# Altium PCB BOARD.PcbDoc
Units mm, origin at the board's own origin, x right, y up, seen from the top; angles counter-clockwise.
Board outline 35 x 24 mm, 2 copper layers (Top Layer, Bottom Layer), stack 1.18 mm thick; 51 components, 35 nets, 177 pads, 108 vias.
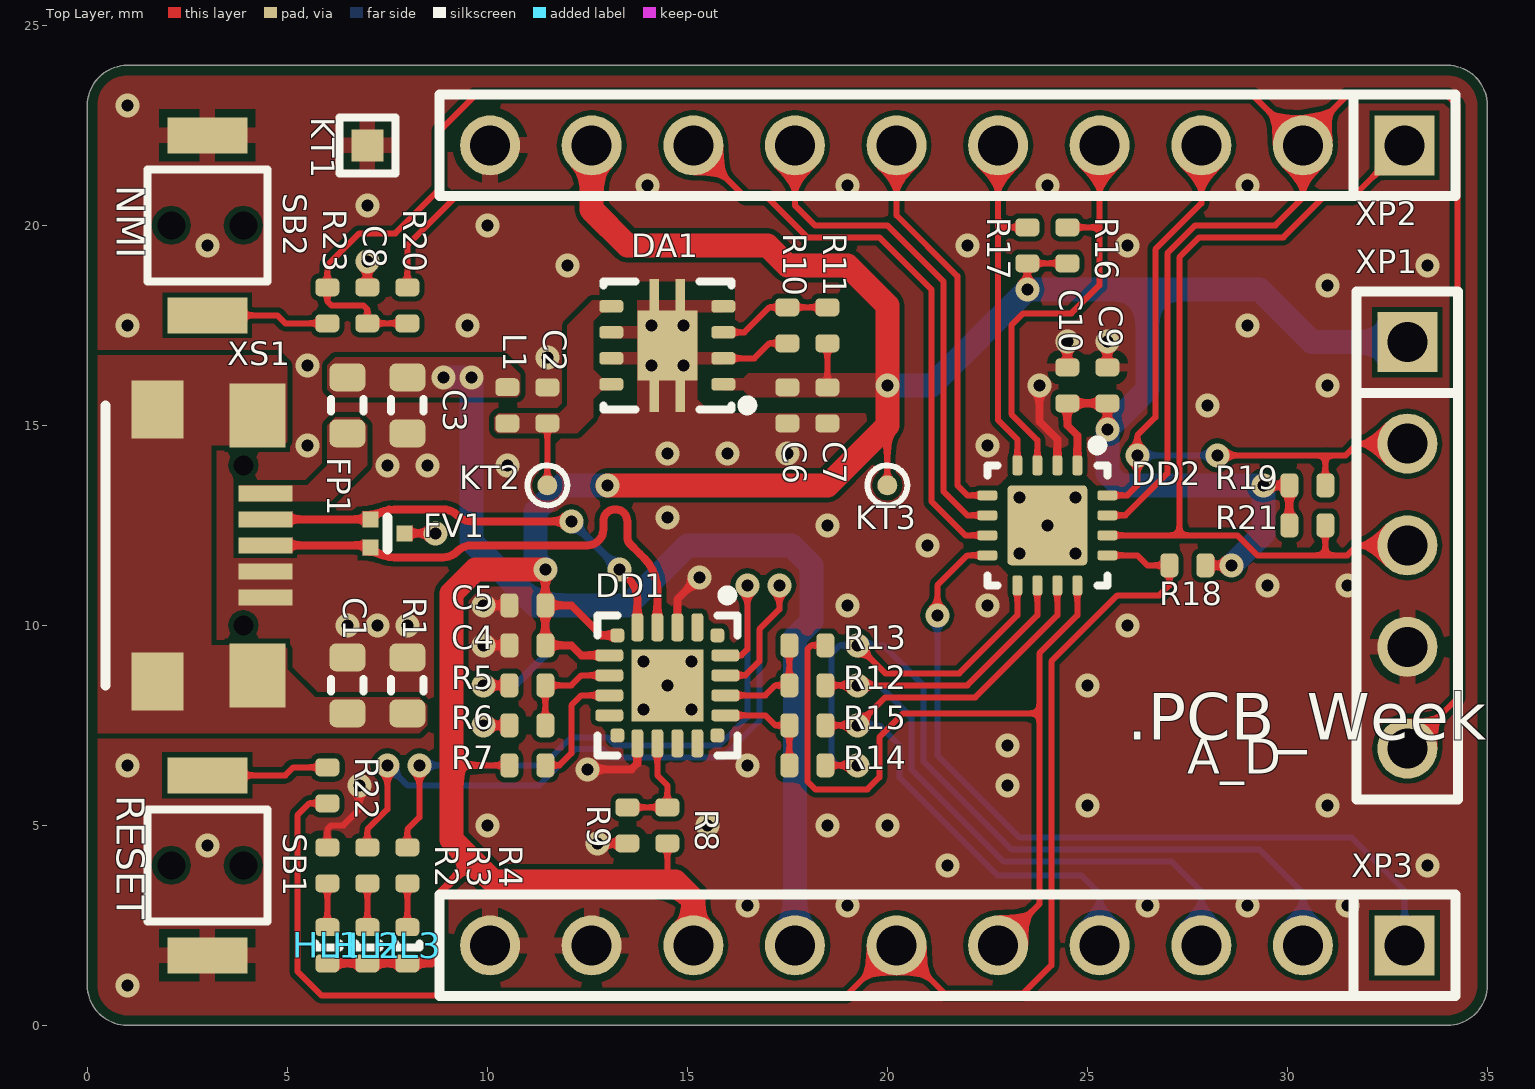
[diagram p0: Top Layer view]
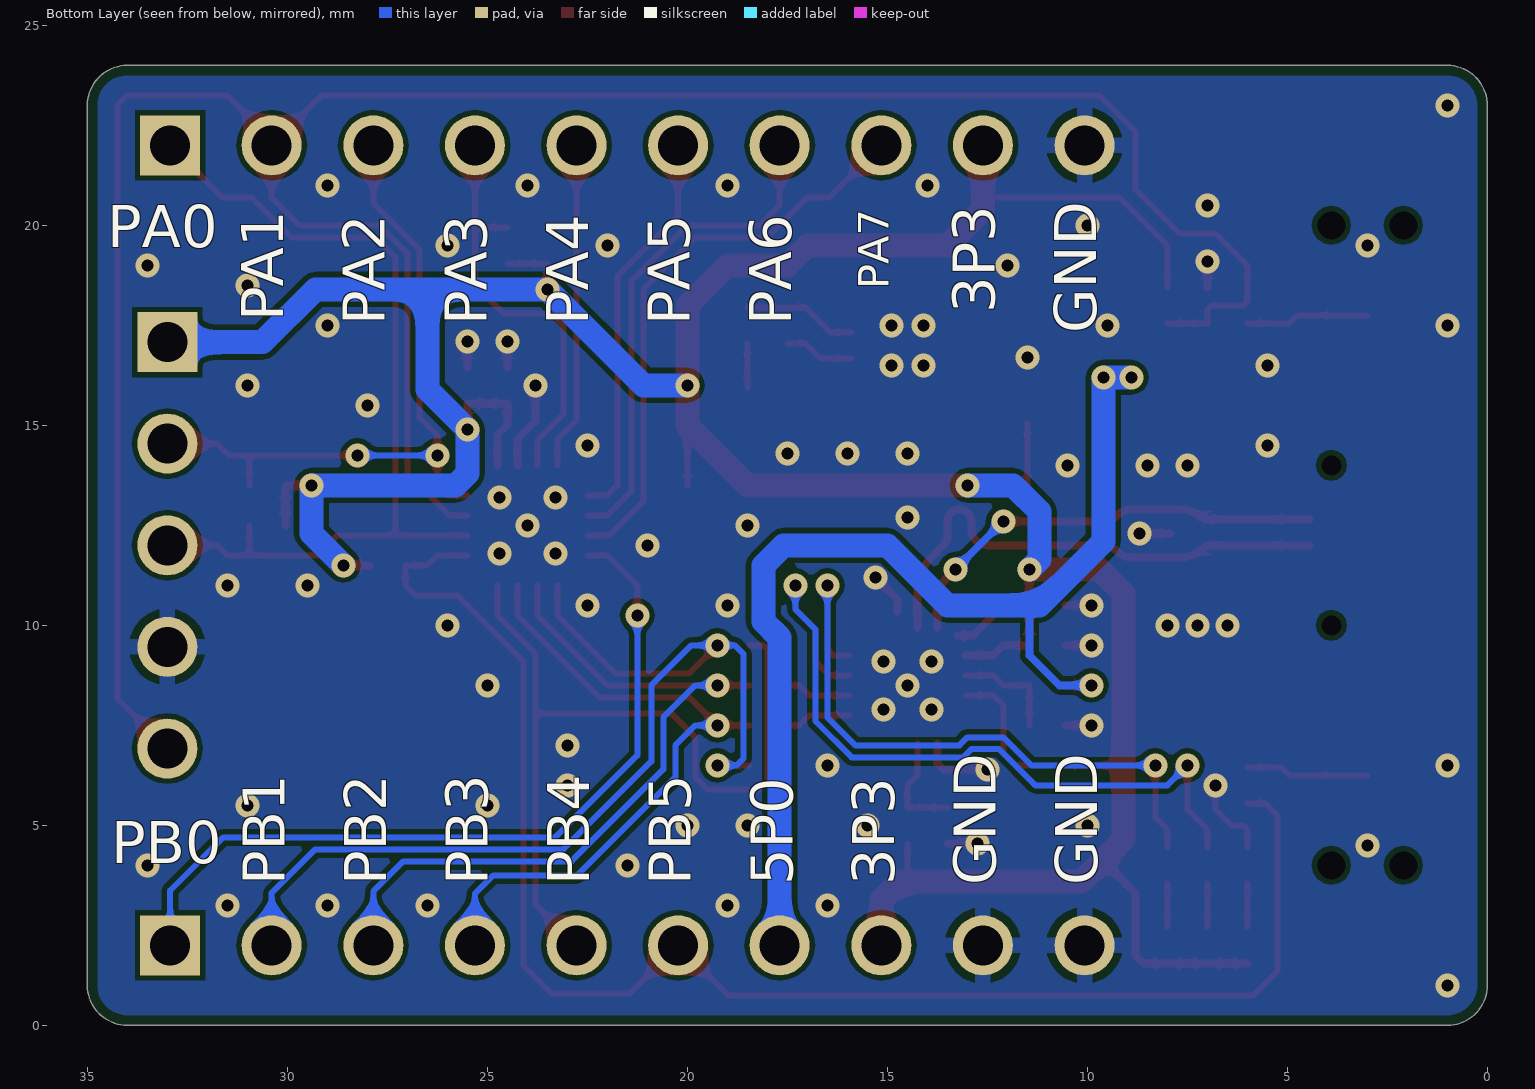
[diagram p1: Bottom Layer view, seen from below]
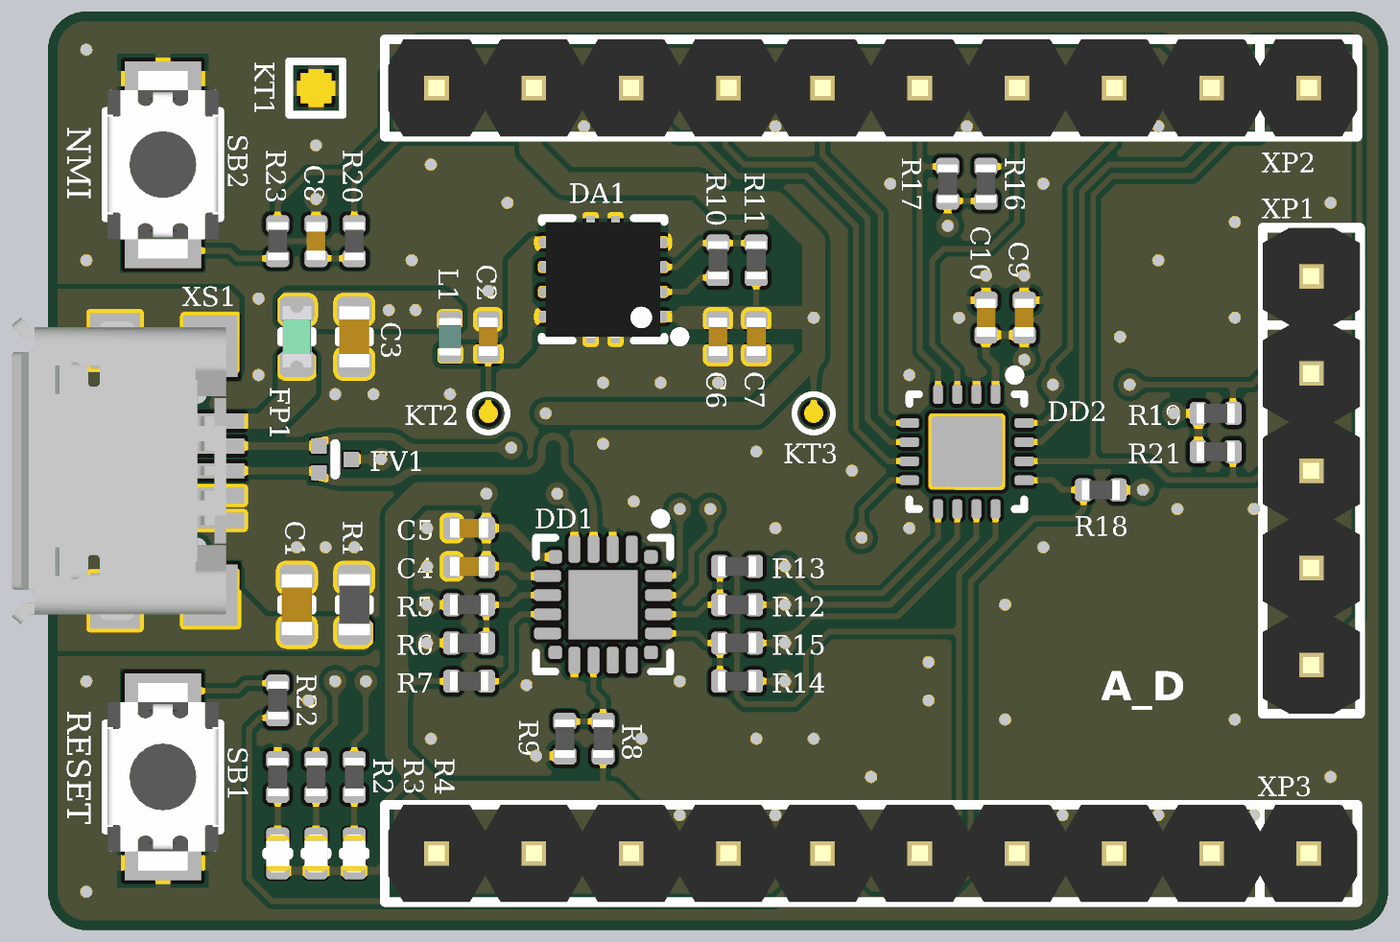
[diagram p2: 3D render of the assembled board from above, using the file's embedded part models]

## Layer stack, top to bottom
Top Solder: solder mask 0.01, Solder Resist, Dk 3.5
Top Layer: signal copper 0.03
Dielectric1: core 1.12, FR-4, Dk 4.2
Bottom Layer: signal copper 0.03
Bottom Solder: solder mask 0.01, Solder Resist, Dk 3.5

## Board outline
0,1 ccw(c1,1) 1,0 34,0 ccw(c34,1) 35,1 35,23 ccw(c34,23) 34,24 1,24 ccw(c1,23) 0,23

## Design rules (kind name [scope] priority, off if disabled: settings)
BoardOutlineClearance [All] p1: gap=0.25 ignorepadtopadclearanceinfootprint=FALSE
Clearance [All] p1: gap=0.127 ignorepadtopadclearanceinfootprint=FALSE
ComponentClearance [All] p1 off: gap=0.25 collisioncheckmode=3 verticalgap=0.25 showdistances=FALSE
DiffPairsRouting [All] p1: maxlimit=0.4 minlimit=0.15 mostfreqgap=0.25 toplayer_minwidth=0.2 toplayer_maxwidth=0.4 toplayer_prefwidth=0.25 bottomlayer_minwidth=0.2 bottomlayer_maxwidth=0.4 bottomlayer_prefwidth=0.25 maxuncoupledlength=12
Height [All] p1: minheight=0 maxheight=25 prefheight=25
HoleSize [All] p1: absolutevalues=TRUE maxlimit=6 minlimit=0.3 maxpercent=80.000 minpercent=20.000
HoleToHoleClearance [All] p1: gap=0.25 allowstackedmicrovias=TRUE
MatchedLengths "Schematic Matched Net Lengths" [InNet('USBD_P')] p1: tolerance=1 checknetsindiffpair=TRUE checkdiffpairvsdiffpair=FALSE checkxsignals=FALSE checkothers=FALSE
MatchedLengths "Schematic Matched Net Lengths_7" [InNetClass('USBD')] p2: tolerance=1 checknetsindiffpair=TRUE checkdiffpairvsdiffpair=FALSE checkxsignals=FALSE checkothers=FALSE
MinimumSolderMaskSliver [All] p1 off: minsoldermaskwidth=0.254
PlaneClearance [All] p1: clearance=0.5
PlaneConnect [All] p1: planeconnectstyle=Relief reliefexpansion=0.5 reliefentries=4 reliefconductorwidth=0.25 reliefairgap=0.25
PolygonConnect PolygonConnect_DirectConnect [InComponentClass('DirectConnect')] p1: connectstyle=Direct reliefconductorwidth=0.254 reliefentries=4 polygonreliefangle="90 Angle" airgapwidth=0.254
PolygonConnect PolygonConnect_Components [InComponent('C*') OR InComponent('R*') OR InComponent('NR*') OR InComponent('DA*') OR InComponent('DD*') OR InComponent('HL*')] p2: connectstyle=Relief reliefconductorwidth=0.2 reliefentries=4 polygonreliefangle="90 Angle" airgapwidth=0.2
PolygonConnect PolygonConnect_Connectors [All vs (InPadClass('All Pads'))] p3: connectstyle=Relief reliefconductorwidth=0.4 reliefentries=4 polygonreliefangle="90 Angle" airgapwidth=0.2
PolygonConnect PolygonConnect_Via [All] p4: connectstyle=Direct reliefconductorwidth=0.254 reliefentries=4 polygonreliefangle="90 Angle" airgapwidth=0.254
RoutingCorners [All] p1: cornerstyle=45-Degree minsetback=1.5 maxsetback=3.5
RoutingVias [All] p1: holewidth=0.6 width=1.2 viastyle="Through Hole" minholewidth=0.3 minwidth=0.6 maxholewidth=1 maxwidth=2
SMDEntry [All] p1: side=TRUE corner=TRUE anyangle=TRUE
SilkToSilkClearance [All] p1 off: silktosilkclearance=0.254
SilkToSolderMaskClearance [IsPad] p1 off: minsilkscreentomaskgap=0.254 clearancetoexposedcopper=TRUE
SolderMaskExpansion [All] p1: expansion=0.1
Width [All] p1: maxlimit=8 minlimit=0.15 preferedwidth=0.6
Width Width_TrackEnds [All] p2 off: maxlimit=0.25 minlimit=0.25 preferedwidth=0.25 checkconnectedcopper=TRUE
19 further rules are at their usual default settings.

## Classes and differential pairs
differential pair class USB: USBD
component class DirectConnect: C1 C2 C3 C4 C5 C6 C7 DA1 FP1 L1 R1 XS1
differential pair USBD: +USBD_P -USBD_N

## Components (designator, comment, footprint, x,y, rotation, side; value= is the part's Value field where it differs from the comment)
C1 "Capacitor" C0603_L 6.5,8.5 r270 top value=0.1uF
C2 "Capacitor" C0402_L 11.5,15.5 r270 top value=4.7uF
C3 "Capacitor" C0603_L 8,15.5 r90 top value=10uF
C4 "Capacitor" C0402_L 11,9.5 r0 top value=4.7uF
C5 "Capacitor" C0402_L 11,10.5 r0 top value=4.7uF
C6 "Capacitor" C0402_L 17.5,15.5 r90 top value=4.7uF
C7 "Capacitor" C0402_L 18.5,15.5 r90 top value=4.7uF
C8 "Capacitor" C0402_L 7,18 r90 top value=0.1uF
C9 "Capacitor" C0402_L 25.5,16 r90 top value=1uF
C10 "Capacitor" C0402_L 24.5,16 r270 top value=0.1uF
DA1 "TPS73701DRB" VSON-8_065P300X300X100_N 14.5,17 r90 top locked value=TPS73701DRBR
DD1 "CP2102N-xxx-GQFN20" QFN-20_050P300X300X080_N 14.5,8.5 r270 top locked value=CP2102N-A01-GQFN20
DD2 "MKL03ZxxVFG4-Series" HUQFN-16_050P300X300X065_N 24,12.5 r270 top locked value=MKL03Z8VFG4
FP1 "Fuse_PTC" F0603_L 6.5,15.5 r90 top value=0603L100SLYR
FV1 "TPD2EUSB30DRT" SOT-3_070P100X080X050_N 7.5,12.3 r270 top
HL1 "" LD0402_L 6,2 r90 top value=KPHHS-1005QBC-D-V
HL2 "" LD0402_L 7,2 r90 top value=KPHHS-1005CGCK
HL3 "" LD0402_L 8,2 r90 top value=KPHHS-1005SURCK
KT1 "Text" TP-SMT-R-0.8mm 7,22 r0 top value=TestPoint-SMT
KT2 "Text" TP-SMT-C-0.5mm 11.5,13.5 r0 top value=TestPoint-SMT
KT3 "Text" TP-SMT-C-0.5mm 20,13.5 r0 top value=TestPoint-SMT
L1 "FerriteBead" L0402_L 10.5,15.5 r270 top value=BLM15PD121SN1D
R1 "Resistor" R0603_L 8,8.5 r270 top value=0
R2 "Resistor" R0402_L 6,4 r270 top value=1k
R3 "Resistor" R0402_L 7,4 r270 top value=1k
R4 "Resistor" R0402_L 8,4 r270 top value=1k
R5 "Resistor" R0402_L 11,8.5 r0 top value=22.1k
R6 "Resistor" R0402_L 11,7.5 r0 top value=47k
R7 "Resistor" R0402_L 11,6.5 r180 top value=10k
R8 "Resistor" R0402_L 14.5,5 r270 top value=10k
R9 "Resistor" R0402_L 13.5,5 r90 top value=0
R10 "Resistor" R0402_L 17.5,17.5 r90 top value=12k
R11 "Resistor" R0402_L 18.5,17.5 r270 top value=22.1k
R12 "Resistor" R0402_L 18,8.5 r0 top value=0
R13 "Resistor" R0402_L 18,9.5 r0 top value=0
R14 "Resistor" R0402_L 18,6.5 r0 top value=0
R15 "Resistor" R0402_L 18,7.5 r0 top value=0
R16 "Resistor" R0402_L 24.5,19.5 r270 top value=4.7k
R17 "Resistor" R0402_L 23.5,19.5 r270 top value=4.7k
R18 "Resistor" R0402_L 27.5,11.5 r180 top value=10k
R19 "Resistor" R0402_L 30.5,13.5 r0 top value=10k
R20 "Resistor" R0402_L 8,18 r270 top value=10k
R21 "Resistor" R0402_L 30.5,12.5 r0 top value=10k
R22 "Resistor" R0402_L 6,6 r90 top value=100
R23 "Resistor" R0402_L 6,18 r270 top value=100
SB1 "RESET" IT-1185AP 3,4 r0 top locked value=IT-1185AP
SB2 "NMI" IT-1185AP 3,20 r180 top locked value=IT-1185AP
XP1 "Text" PLS-5 33,12 r270 top locked value=PLS-5
XP2 "PA" PLS-10 21.5,22 r180 top locked value=PLS-10
XP3 "PB" PLS-10 21.5,2 r180 top locked value=PLS-10
XS1 "USB" 1981568-1 2,12 r270 top locked value=1981568-1

## Footprints (in the part's own frame and the unit in brackets; to place one, negate y for a bottom-side part, rotate by r counter-clockwise, add the part's x,y. Pads: shape width x height; smd on the part's side, far side on the other; paste and mask are expansions set on the pad)
1981568-1 [mm]
  round 0 hole 0.5 unplated: 0(-2,1.9) 0(2,1.9)
  rect 0.4x1.35 smd: 1(-1.3,2.45) 2(-0.65,2.45) 3(0,2.45) 4(0.65,2.45) 5(1.3,2.45)
  rect 1.45x1.3 smd: 6(-3.4,-0.25) 6(3.4,-0.25)
  rect 1.6x1.4 smd: 6(-3.25,2.25) 6(3.25,2.25)
  silkscreen extent -3.5,-1.55 3.5,-1.55, body extent -4,-2.95 4,2.65, height 2.79
C0402_L [mm] "Chip Capacitor; Body 1.0 x 0.5 mm (LxW typ)"
  rrect50% 0.45x0.6 smd: 1(-0.45,0) 2(0.45,0)
  body extent -0.5,-0.25 0.5,0.25, height 0.61
C0603_L [mm] "Chip Capacitor; Body 1.6 x 0.8 mm (LxW typ)"
  rrect50% 0.7x0.9 smd: 1(-0.7,0) 2(0.7,0)
  silkscreen extent -0.15,-0.41 0.15,0.41, body extent -0.8,-0.4 0.8,0.4, height 0.91
F0603_L [mm] "1608M"
  rrect50% 0.7x0.9 smd: 1(-0.7,0) 2(0.7,0)
  silkscreen extent -0.15,-0.41 0.15,0.41, body extent -0.8,-0.37 0.8,0.38, height 0.75
HUQFN-16_050P300X300X065_N [mm]
  rrect50% 0.5x0.25 smd: 1(-1.5,0.75) 2(-1.5,0.25) 3(-1.5,-0.25) 4(-1.5,-0.75) 9(1.5,-0.75) 10(1.5,-0.25) 11(1.5,0.25) 12(1.5,0.75)
  rrect50% 0.25x0.5 smd: 5(-0.75,-1.5) 6(-0.25,-1.5) 7(0.25,-1.5) 8(0.75,-1.5) 13(0.75,1.5) 14(0.25,1.5) 15(-0.25,1.5) 16(-0.75,1.5)
  rrect10% 2x2 smd paste-0.075: TP(0,0)
  silkscreen extent -2.12,-1.5 1.5,1.5, body extent -1.5,-1.5 1.5,1.5, height 0.65
IT-1185AP [mm]
  rect 2x0.9 smd: 1(0,2.25) 2(0,-2.25)
  round 0.1 hole 0.7 unplated: 4(-0.9,0) 4(0.9,0)
  silkscreen extent -1.5,-1.4 1.5,1.4, body extent -1.45,-2.45 1.45,2.45, height 2.04
L0402_L [mm] "Chip Coil; Body 1.0 x 0.5 mm (LxW typ)"
  rrect50% 0.45x0.6 smd mask+0.05: 1(-0.452,0) 2(0.452,0)
  body extent -0.5,-0.3 0.5,0.3, height 0.5
LD0402_L [mm] "Chip Led; Body 1.0 x 0.5 mm (LxW typ)"
  rrect50% 0.45x0.6 smd mask+0.05: 1(-0.452,0) 2(0.452,0)
  silkscreen extent -0.05,-0.3 0.05,0.3, body extent -0.5,-0.3 0.5,0.3, height 0.2
PLS-5 [mm]
  rect 1.5x1.5 hole 1: 1(-5.08,0)
  round 1.5 hole 1: 2(-2.54,0) 3(0,0) 4(2.54,0) 5(5.08,0)
  silkscreen extent -6.35,-1.27 6.35,1.27, body extent -6.35,-1.27 6.35,1.27, height 8.9
PLS-10 [mm]
  rect 1.5x1.5 hole 1: 1(-11.43,0)
  round 1.5 hole 1: 2(-8.89,0) 3(-6.35,0) 4(-3.81,0) 5(-1.27,0) 6(1.27,0) 7(3.81,0) 8(6.35,0) 9(8.89,0) 10(11.43,0)
  silkscreen extent -12.7,-1.27 12.7,1.27, body extent -12.7,-1.27 12.62,1.27, height 8.9
QFN-20_050P300X300X080_N [mm]
  rrect50% 0.35x0.35 smd: 1(-1.25,1.25) 6(-1.25,-1.25) 11(1.25,-1.25) 16(1.25,1.25)
  rrect50% 0.7x0.3 smd: 2(-1.45,0.75) 3(-1.45,0.25) 4(-1.45,-0.25) 5(-1.45,-0.75) 12(1.45,-0.75) 13(1.45,-0.25) 14(1.45,0.25) 15(1.45,0.75)
  rrect50% 0.3x0.7 smd: 7(-0.75,-1.45) 8(-0.25,-1.45) 9(0.25,-1.45) 10(0.75,-1.45) 17(0.75,1.45) 18(0.25,1.45) 19(-0.25,1.45) 20(-0.75,1.45)
  rect 1.8x1.8 smd: TP(0,0)
  silkscreen extent -2.37,-1.75 1.75,1.75, body extent -1.5,-1.5 1.5,1.5, height 0.8
R0402_L [mm] "Chip Resistor; Body 1.0 x 0.5 mm (LxW typ)"
  rrect50% 0.45x0.6 smd: 1(-0.45,0) 2(0.45,0)
  body extent -0.5,-0.26 0.5,0.26, height 0.36
R0603_L [mm] "Chip Resistor; Body 1.6 x 0.8 mm (LxW typ)"
  rrect50% 0.7x0.9 smd: 1(-0.7,0) 2(0.7,0)
  silkscreen extent -0.15,-0.41 0.15,0.41, body extent -0.8,-0.41 0.8,0.41, height 0.46
SOT-3_070P100X080X050_N [mm]
  rect 0.4x0.4 smd mask+0.05: 1(-0.35,-0.425) 2(0,0.425) 3(0.35,-0.425)
  silkscreen extent -0.4,0 0.4,0, body extent -0.5,-0.4 0.5,0.4, height 0.5
TP-SMT-C-0.5mm [mm]
  round 0.5 smd paste-1: 1(0,0)
  silkscreen extent -0.5,-0.5 0.5,0.5
TP-SMT-R-0.8mm [mm]
  rect 0.8x0.8 smd paste-1: 1(0,0)
  silkscreen extent -0.7,-0.7 0.7,0.7
VSON-8_065P300X300X100_N [mm]
  rrect50% 0.31x0.6 smd paste-0.025: 1(-0.975,-1.4) 2(-0.325,-1.4) 3(0.325,-1.4) 4(0.975,-1.4) 5(0.975,1.4) 6(0.325,1.4) 7(-0.325,1.4) 8(-0.975,1.4)
  rect 0.825x0.23 smd: TP(-1.25,-0.325) TP(-1.25,0.325) TP(1.25,-0.325) TP(1.25,0.325)
  rect 1.75x1.5 smd: TP(0,0)
  silkscreen extent -1.62,-2.13 1.6,1.6, body extent -1.52,-1.52 1.52,1.52, height 1.04

## Part data
C1: library part GRM188R72A104KA35D, Dielectric Type=X7R, Manufacturer=Murata, Tolerance=±10%, Voltage=100V, Working Temperature Max=+125°С, Working Temperature Min=-55°С, Application Category=1, ClassName=DirectConnect, ID=232, Part Number=GRM188R72A104KA35D, Published=18.05.2010, Publisher="Andrew Danich", Type=Конденсатор
C2 C4 C5 C6 C7: library part GRM155R60J475ME87D, Dielectric Type=X5R, Manufacturer=Murata, Tolerance=±20%, Voltage=6.3V, Working Temperature Max=+85°С, Working Temperature Min=-55°С, Application Category=1, ClassName=DirectConnect, ID=223, Part Number=GRM155R60J475ME87D, Published=18.05.2010, Publisher="Andrew Danich", Type=Конденсатор
C3: library part GRM188R60J106ME47D, Dielectric Type=X5R, Manufacturer=Murata, Tolerance=±20%, Voltage=6.3V, Working Temperature Max=+85°С, Working Temperature Min=-55°С, Application Category=1, ClassName=DirectConnect, ID=136, Part Number=GRM188R60J106ME47D, Published=18.05.2010, Publisher="Andrew Danich", Type=Конденсатор
C8 C10: library part GCM155R71C104KA55D, Dielectric Type=X7R, Manufacturer=Murata, Tolerance=±10%, Voltage=16V, Working Temperature Max=+125°С, Working Temperature Min=-55°С, Application Category=1, Functional Analog=GRM155R71C104KA88D, ID=163, Part Number=GCM155R71C104KA55D, Published=18.05.2010, Publisher="Andrew Danich", Type=Конденсатор
C9: library part GRM155C71A105KE11D, Dielectric Type=X7S, Manufacturer=Murata, Tolerance=±10%, Voltage=10V, Working Temperature Max=+125°С, Working Temperature Min=-55°С, Application Category=1, ID=179, Part Number=GRM155C71A105KE11D, Published=18.05.2010, Publisher="Andrew Danich", Type=Конденсатор
DA1: library part TPS73701DRBR, Input Voltage=+2.2…5.5V, Manufacturer="Texas Instruments", Output Current=1A, Output Voltage=+1.2…5.5V, Working Temperature Max=+125°С, Working Temperature Min=-40°С, Application Category=1, ClassName=DirectConnect, Functional Analog=TPS73701DRBT, ID=26, Part Number=TPS73701DRBR, Published=25.03.2019, Publisher="Andrew Danich", Type=Микросхема
DD1: library part CP2102N-A01-GQFN20, Manufacturer="Silicon Labs", Supply Current=13.7mA, Working Temperature Max=+85°C, Working Temperature Min=-40°C, Application Category=1, Channels=1, Functional Analog=CP2102N-A02-GQFN20, ID=14, Input Interface=UART, OTG Support=No, Part Number=CP2102N-A01-GQFN20, Published=16.07.2019, Publisher="Andrew Danich", Supply Operation=+3.0…3.6V, Type=Микросхема, USB Speed Support="12 Mb/s", USB Type Support="USB 2.0"
DD2: library part MKL03Z8VFG4, Manufacturer="NXP Semiconductors", Operation Frequency=48MHz, Working Temperature Max=+105°С, Working Temperature Min=-40°С, Application Category=1, EEPROM=-, Flash=8K, I/O Lines=14, ID=29, Part Number=MKL03Z8VFG4, Prog Interface=SWD, Published=16.07.2019, Publisher="Andrew Danich", SRAM=2K, Supply Operation=+1.71…3.6V, Type=Микросхема
FP1: library part 0603L100SLYR, Limit Voltage=6V, Manufacturer=Littelfuse, Rated Current=1A, Resistance=0.12ohm, Working Temperature Max=+85°С, Working Temperature Min=-40°С, Application Category=1, ClassName=DirectConnect, Functional Analog=-, ID=13, Part Number=0603L100SLYR, Published=25.0.2017, Type="Предохранитель самовосстанавливающийся"
FV1: Breakdown Voltage=7V, Forward Voltage=0.95V, Junction Capacitance=0.8pF, Manufacturer="Texas Instruments", Peak Forward Current=5A, Pulse Power Dissipation=45W, Reverse Stand Off Voltage=5.5V, Working Temperature Max=+85°С, Working Temperature Min=-40°С, Application Category=1, Directional=Bidirectional, Functional Analog=-, ID=5, Part Number=TPD2EUSB30DRT, Published=27.12.2015, Publisher="Andrew Danich", Type=Супрессор
HL1: library part KPHHS-1005QBC-D-V, Color=Blue, Forward Current=20mA, Forward Voltage=3.3V, Manufacturer=Kingbright, Power Dissipation=120mW, Working Temperature Max=+85°С, Working Temperature Min=-40°С, Application Category=1, ID=24, Leds=1, Luminous Flux=60, Part Number=KPHHS-1005QBC-D-V, Published=03.12.2013, Publisher="Andrew Danich", Type="Индикатор единичный"
HL2: library part KPHHS-1005CGCK, Color=Green, Forward Current=20mA, Forward Voltage=2.1V, Manufacturer=Kingbright, Power Dissipation=75mW, Working Temperature Max=+85°С, Working Temperature Min=-40°С, Application Category=1, ID=25, Leds=1, Luminous Flux=60, Part Number=KPHHS-1005CGCK, Published=03.12.2013, Publisher="Andrew Danich", Type="Индикатор единичный"
HL3: library part KPHHS-1005SURCK, Color=Red, Forward Current=20mA, Forward Voltage=2.5V, Manufacturer=Kingbright, Power Dissipation=75mW, Working Temperature Max=+85°С, Working Temperature Min=-40°С, Application Category=1, ID=35, Leds=1, Luminous Flux=140, Part Number=KPHHS-1005SURCK, Published=03.12.2013, Publisher="Andrew Danich", Type="Индикатор единичный"
KT1: library part TestPoint-SMT-GND, Manufacturer=-, Application Category=1, Application Type="On PCB Test Point", Functional Analog=-, ID=7, Part Number=TestPoint-SMT-GND, Published=03.03.2015, Publisher="Andrew Danich"
KT2 KT3: library part TestPoint-SMT, Manufacturer=-, Application Category=1, Application Type="On PCB Test Point", Functional Analog=-, ID=6, Part Number=TestPoint-SMT, Published=03.03.2015, Publisher="Andrew Danich"
L1: library part BLM15PD121SN1D, DC Resistance=0.09ohm, Inductor Type=EMIFIL, Manufacturer=Murata, Rated Current=1.3A, Tolerance=±25%, Working Temperature Max=+125°С, Working Temperature Min=-55°С, Application Category=1, ClassName=DirectConnect, ID=11, Impedance at 100Mhz=120ohm, Part Number=BLM15PD121SN1D, Published=14.11.2014, Publisher="Andrew Danich", Type=Дроссель
R1: library part RC0603JR-070R, Limit Voltage=50V, Manufacturer=Yageo, Temperature Coefficient=100ppm, Tolerance=±5%, Total Power Dissipation=0.1W, Working Temperature Max=+155°С, Working Temperature Min=-55°С, Application Category=1, ClassName=DirectConnect, Functional Analog="RC0603FR-070RL, CR0603-J/-000E", ID=5, Part Number=RC0603JR-070R, Published=24.03.2010, Publisher="Andrew Danich", Series Type=Thick-Film, Type=Резистор
R2 R3 R4: library part RC0402JR-071KL, Limit Voltage=50V, Manufacturer=Yageo, Temperature Coefficient=100ppm, Tolerance=±5%, Total Power Dissipation=0.1W, Working Temperature Max=+155°С, Working Temperature Min=-55°С, Application Category=1, ID=3, Part Number=RC0402JR-071KL, Published=24.03.2010, Publisher="Andrew Danich", Series Type=Thick-Film, Type=Резистор
R5 R11: library part RC0402FR-0722K1L, Limit Voltage=50V, Manufacturer=Yageo, Temperature Coefficient=100ppm, Tolerance=±1%, Total Power Dissipation=0.1W, Working Temperature Max=+155°С, Working Temperature Min=-55°С, Application Category=1, ID=447, Part Number=RC0402FR-0722K1L, Published=24.03.2010, Publisher="Andrew Danich", Series Type=Thick-Film, Type=Резистор
R6: library part RC0402FR-0747KL, Limit Voltage=50V, Manufacturer=Yageo, Temperature Coefficient=100ppm, Tolerance=±1%, Total Power Dissipation=0.1W, Working Temperature Max=+155°С, Working Temperature Min=-55°С, Application Category=1, ID=528, Part Number=RC0402FR-0747KL, Published=24.03.2010, Publisher="Andrew Danich", Series Type=Thick-Film, Type=Резистор
R7 R8 R18 R19 R20 R21: library part RC0402JR-0710KL, Limit Voltage=50V, Manufacturer=Yageo, Temperature Coefficient=100ppm, Tolerance=±5%, Total Power Dissipation=0.1W, Working Temperature Max=+155°С, Working Temperature Min=-55°С, Application Category=1, ID=476, Part Number=RC0402JR-0710KL, Published=24.03.2010, Publisher="Andrew Danich", Series Type=Thick-Film, Type=Резистор
R9 R12 R13 R14 R15: library part RC0402JR-070RL, Limit Voltage=50V, Manufacturer=Yageo, Temperature Coefficient=100ppm, Tolerance=±5%, Total Power Dissipation=0.1W, Working Temperature Max=+155°С, Working Temperature Min=-55°С, Application Category=1, ID=362, Part Number=RC0402JR-070RL, Published=24.03.2010, Publisher="Andrew Danich", Series Type=Thick-Film, Type=Резистор
R10: library part RC0402FR-0712KL, Limit Voltage=50V, Manufacturer=Yageo, Temperature Coefficient=100ppm, Tolerance=±1%, Total Power Dissipation=0.1W, Working Temperature Max=+155°С, Working Temperature Min=-55°С, Application Category=1, ID=318, Part Number=RC0402FR-0712KL, Published=24.03.2010, Publisher="Andrew Danich", Series Type=Thick-Film, Type=Резистор
R16 R17: library part RC0402JR-074K7L, Limit Voltage=50V, Manufacturer=Yageo, Temperature Coefficient=100ppm, Tolerance=±5%, Total Power Dissipation=0.1W, Working Temperature Max=+155°С, Working Temperature Min=-55°С, Application Category=1, ID=4, Part Number=RC0402JR-074K7L, Published=24.03.2010, Publisher="Andrew Danich", Series Type=Thick-Film, Type=Резистор
R22 R23: library part RC0402JR-07100RL, Limit Voltage=50V, Manufacturer=Yageo, Temperature Coefficient=100ppm, Tolerance=±5%, Total Power Dissipation=0.1W, Working Temperature Max=+155°С, Working Temperature Min=-55°С, Application Category=1, ID=479, Part Number=RC0402JR-07100RL, Published=24.03.2010, Publisher="Andrew Danich", Series Type=Thick-Film, Type=Резистор
SB1 SB2: library part IT-1185AP, Isolator Resistance=100meg, Limit Current=50mA, Resistance=0.1ohm, Application Category=1, Backlight=NO, Height=5mm, ID=36, Number of Contacts=2, Part Number=IT-1185AP, Published=17.04.2014, Publisher="Andrew Danich", Type=Переключатель
XP1: library part PLS-5, Limit Current=3A, Limit Voltage=250V, Resistance=15momh, Application Category=1, Connector Type=Male, ID=4, Part Number=PLS-5, Pins=5, Pitch=2.54mm, Published=07.03.2013, Publisher="Andrew Danich", Surface Finish=Gold, Type=Вилка
XP2 XP3: library part PLS-10, Limit Current=3A, Limit Voltage=250V, Resistance=15momh, Application Category=1, Connector Type=Male, ID=9, Part Number=PLS-10, Pins=10, Pitch=2.54mm, Published=07.03.2013, Publisher="Andrew Danich", Surface Finish=Gold, Type=Вилка
XS1: library part 1981568-1, Limit Current=1A, Limit Voltage=24V, Manufacturer="TE Connectivity", Application Category=1, ClassName=DirectConnect, Connector Type=Female, ID=30, Interface="USB 2.0", Max Data Rate="480 mbps", Mount Type=Surface, Part Number=1981568-1, Pins=9, Published=11.04.2016, Publisher="Andrew Danich", Type=Розетка

## Via types
v1: diameter 0.6, hole 0.3, Top Layer to Bottom Layer, tented both sides, 94 vias
v2: diameter 0.6, hole 0.3, Top Layer to Bottom Layer, 14 vias

## Nets (pads, with @x,y where several pads share a name; then routed paths per layer and width w, separated by ;. In a path a pad name is that pad's centre, name@x,y a point inside that pad or via, vN(x,y) a via of type N, cw(c..) or ccw(c..) an arc to the next point about the centre after c; other vN are vias at no path point)
DEBUG_RX: DD1.17 R14.1 R15.1 | length 2.7
  Top Layer w0.15: DD1.17 16.95,7.75 17.2,7.5 R15.1 R14.1
DEBUG_TX: DD1.18 R12.1 R13.1 | length 2.7
  Top Layer w0.15: DD1.18 16.95,8.25 17.2,8.5 R12.1 R13.1
GND: C1.1 C2.1 C3.1 C4.1 C5.1 C6.1 C7.1 C8.2 C9.2 C10.1 DA1.2 DA1.4 DA1.6 DA1.7 DA1.TP DD1.3 DD1.12 DD1.TP DD2.2 DD2.TP FV1.2 KT1.1 R1.1 R2.1 R6.1 R9.1 R10.1 SB1.2 SB2.2 XP1.4 XP2.10 XP3.9 XP3.10 XS1.4 XS1.5 | length 14.3
  Top Layer w0.15: R2.1 6,4.9 6.1,5 6.4,5 6.8,5.4 v1(6.8,6) ; DA1.2 16.675,16.675 17.05,17.05 R10.1
  Top Layer w0.2: C8.2 v1(7,19.1) ; FV1.2 v1(8.7,12.3) ; v1(9.9,7.5) R6.1 ; v1(9.9,9.5) C4.1 ; v1(9.9,10.5) C5.1 ; v1(12.5,6.4) 13.6,6.4 13.75,6.55 DD1.12 ; v1(12.75,4.55) R9.1 ; 14.75,10.35 14.75,10.65 v1(15.3,11.2) ; v1(23.8,16) 23.8,15.1 24.25,14.65 DD2.2 ; C10.1 v1(24.5,17.1) ; C9.2 v1(25.5,17.1)
  other v1: 1,1 16.5,3 19,3 26.5,3 29,3 31.5,3 21.5,4 33.5,4 3,4.5 10,5 15.5,5 18.5,5 20,5 25,5.5 31,5.5 23,6 1,6.5 16.5,6.5 23,7 25,8.5 6.5,10 7.25,10 8,10 26,10 19,10.5 22.5,10.5 29.5,11 31.5,11 21,12 18.5,12.5 14.5,12.7 7.5,14 8.5,14 10.5,14 14.5,14.3 16,14.3 17.5,14.3 5.5,14.5 22.5,14.5 28,15.5 31,16 5.5,16.5 11.5,16.7 1,17.5 9.5,17.5 29,17.5 31,18.5 12,19 33.5,19 3,19.5 22,19.5 26,19.5 10,20 7,20.5 14,21 19,21 24,21 29,21 1,23
  other v2: 13.9,7.9 15.1,7.9 14.5,8.5 13.9,9.1 15.1,9.1 23.3,11.8 24.7,11.8 24,12.5 23.3,13.2 24.7,13.2 14.1,16.5 14.9,16.5 14.1,17.5 14.9,17.5
LED_RX_N: DD1.19 R3.1 | length 19.3
  Top Layer w0.15: R3.1 7,4.9 7.5,5.4 v1(7.5,6.5) ; DD1.19 16.45,8.75 16.8,9.1 16.8,9.9 17.3,10.4 v1(17.3,11)
  Bottom Layer w0.15: v1(7.5,6.5) 8,6 8.09,6 8.092,5.998 8.508,5.998 8.51,6 11.3,6 12.202,6.902 12.898,6.902 13.1,6.7 15.892,6.7 16.8,7.608 16.8,9.9 17.3,10.4 v1(17.3,11)
LED_TX_N: DD1.20 R4.1 | length 16.5
  Top Layer w0.15: R4.1 8,4.9 8.3,5.2 v1(8.3,6.5) ; DD1.20 16.35,9.25 16.5,9.4 v1(16.5,11)
  Bottom Layer w0.15: v1(8.3,6.5) 11.4,6.5 12.1,7.2 13,7.2 13.2,7 15.8,7 16.5,7.7 v1(16.5,11)
NetC1_2: C1.2 R1.2 XS1.6
NetC2_2: C2.2 DA1.5 DA1.8 KT2.1 L1.2 | length 1.6
  Top Layer w0.15: KT2.1 C2.2
NetDA1_3: DA1.3 R10.2 R11.1 | length 2.9
  Top Layer w0.15: DA1.3 16.425,17.325 17.05,17.95 R10.2 R11.1
NetDD1_8: DD1.8 R5.2 R6.2 | length 2.7
  Top Layer w0.15: R6.2 R5.2 12.1,8.5 12.35,8.75 DD1.8
NetDD1_9: DD1.9 R7.1 | length 3
  Top Layer w0.15: R7.1 11.8,6.5 12.1,6.8 12.1,8 12.35,8.25 DD1.9
NetDD1_13: DD1.13 R8.1 R9.2 | length 2.7
  Top Layer w0.15: R9.2 R8.1 14.5,6 14.25,6.25 DD1.13
NetHL1_2: HL1.2 R2.2 | length 1.1
  Top Layer w0.15: HL1.2 R2.2
NetHL2_2: HL2.2 R3.2 | length 1.1
  Top Layer w0.15: HL2.2 R3.2
NetHL3_2: HL3.2 R4.2 | length 1.1
  Top Layer w0.15: HL3.2 R4.2
NetR22_2: R22.2 SB1.1 | length 3.1
  Top Layer w0.15: SB1.1 4.95,6.25 5.15,6.45 R22.2
NetR23_2: R23.2 SB2.1 | length 3.1
  Top Layer w0.15: SB2.1 4.75,17.75 4.95,17.55 R23.2
PA0: DD2.14 R21.2 XP1.3 XP2.1 | length 22.3
  Top Layer w0.15: DD2.14 27.3,12.25 ; R21.2 30.95,11.75 ; XP2.1 31.63,20.7 30.9,20.7 29.9,19.7 27.8,19.7 27.3,19.2 27.3,12.25 ; XP1.3 31.75,12 31.5,11.75 30.95,11.75 ; 27.3,12.25 28.75,12.25 29.25,11.75 30.95,11.75
PA1: C8.1 DD2.15 R20.2 R23.1 XP1.5 XP2.2 | length 64.7
  Top Layer w0.15: R20.2 C8.1 7,17.9 6.9,18 6.1,18 6,18.1 R23.1 6,19 6.8,19.8 7.7,19.8 8.8,20.9 8.8,22.35 9.7,23.25 29.14,23.25 XP2.2 ; DD2.15 25.95,12.75 27,13.8 27,19.3 27.7,20 29.7,20 30.39,20.69 XP2.2 ; XP1.5 34.25,8.17 34.25,23 34,23.25 31.5,23.25 30.39,22.14 XP2.2
PA2: DD2.16 R19.2 XP1.2 XP2.3 | length 17.6
  Top Layer w0.15: DD2.16 26,13.25 26.25,13.5 v1(26.25,14.25) 26.25,14.75 26.7,15.2 26.7,19.4 27.85,20.55 XP2.3 ; v1(28.25,14.25) 30.95,14.25 ; R19.2 30.95,14.25 ; XP1.2 31.75,14.54 31.46,14.25 30.95,14.25
  Bottom Layer w0.15: v1(26.25,14.25) v1(28.25,14.25)
PA3: DD2.3 R16.1 XP2.4 | length 10.7
  Top Layer w0.15: DD2.3 23.75,14.63 23.1,15.28 23.1,17.5 23.4,17.8 24.6,17.8 25.3,18.5 ; R16.1 25.31,19.95 ; 25.31,18.5 25.31,19.95 ; XP2.4 25.31,19.95
PA4: DD2.4 R17.1 XP2.5 | length 8.9
  Top Layer w0.15: XP2.5 22.77,19.95 ; DD2.4 23.25,14.65 22.77,15.13 22.77,19.95 ; R17.1 22.77,19.95
PA5: DD2.5 XP2.6 | length 10
  Top Layer w0.15: XP2.6 20.23,20.25 21.75,18.73 21.75,13.5 22,13.25 DD2.5
PA6: DD2.6 XP2.7 | length 12.6
  Top Layer w0.15: XP2.7 17.69,20.5 18.19,20 20,20 21.4,18.6 21.4,13.35 22,12.75 DD2.6
PA7: DD2.7 XP2.8 | length 14.5
  Top Layer w0.15: XP2.8 16.45,20.7 17,20.7 18,19.7 19.8,19.7 21.1,18.4 21.1,13.1 21.95,12.25 DD2.7
PB0: DD2.8 XP3.1 | length 20.3
  Top Layer w0.15: v1(21.25,10.25) 21.25,11 22,11.75 DD2.8
  Bottom Layer w0.15: v1(21.25,10.25) 21.25,6.75 23.3,4.7 31.6,4.7 32.93,3.37 XP3.1
PB1: DD2.9 R14.2 XP3.2 | length 26.6
  Top Layer w0.15: R14.2 v1(19.25,6.5) ; v1(19.25,9.5) 19.95,8.8 21.8,8.8 23.25,10.25 DD2.9
  Bottom Layer w0.15: v1(19.25,6.5) 18.767,6.5 18.6,6.667 18.6,9.285 18.815,9.5 v1(19.25,9.5) 19.9,9.5 20.9,8.5 20.9,6.6 23.1,4.4 29.3,4.4 30.39,3.31 XP3.2
PB2: DD2.10 R12.2 XP3.3 | length 19.6
  Top Layer w0.15: R12.2 22,8.5 23.75,10.25 DD2.10
  Bottom Layer w0.15: v1(19.25,8.5) 19.8,8.5 20.6,7.7 20.6,6.4 22.9,4.1 27.1,4.1 27.85,3.35 XP3.3
PB3: DD2.11 R15.2 XP3.4 | length 17.3
  Top Layer w0.15: R15.2 v1(19.25,7.5) 19.95,8.2 22.2,8.2 24.25,10.25 DD2.11
  Bottom Layer w0.15: v1(19.25,7.5) 19.8,7.5 20.3,7 20.3,6.2 22.75,3.75 24.85,3.75 25.31,3.29 XP3.4
PB4: DD2.12 R13.2 XP3.5 | length 20.9
  Top Layer w0.15: R13.2 18.1,9.5 18,9.4 18,6.1 18.2,5.9 19.5,5.9 19.8,6.2 19.8,7.2 20.4,7.8 23.8,7.8 ; XP3.5 23.8,3.03 23.8,7.8 ; DD2.12 24.75,10.25 23.8,9.3 23.8,7.8
PB5: DD2.13 R18.2 R22.1 XP3.6 | length 38.7
  Top Layer w0.15: R22.1 5.55,5.55 5.25,5.25 5.25,1.35 5.85,0.75 18.98,0.75 XP3.6 21.43,0.8 23.4,0.8 24.1,1.5 24.1,9.1 25.75,10.75 26.8,10.75 27.05,11 R18.2 26.5,11.5 26.25,11.75 DD2.13
USBD_N: DD1.5 FV1.1 XS1.2 | length 11.1
  Top Layer w0.2: XS1.2 FV1.1 cw(c7.679,12.046) 7.679,12.9 8.888,12.9 cw(c8.888,12.388) 9.25,12.75 ccw(c9.612,13.112) 9.612,12.6 v1(12.1,12.6) ; v1(13.3,11.4) 13.525,11.175 cw(c12.982,10.632) 13.75,10.632 DD1.5
  Bottom Layer w0.2: v1(12.1,12.6) v1(13.3,11.4)
USBD_P: DD1.4 FV1.3 XS1.3 | length 12.9
  Top Layer w0.2: XS1.3 7.025,12 FV1.3 ccw(c7.679,12.554) 7.679,11.7 8.888,11.7 ccw(c8.888,12.212) 9.25,11.85 ; 9.25,11.85 cw(c9.612,11.488) 9.612,12 12.5,12 ccw(c12.5,12.4) 12.9,12.4 12.9,12.6 cw(c13.2,12.6) 13.2,12.9 cw(c13.2,12.6) 13.5,12.6 13.5,12.2 ccw(c13.741,12.2) 13.571,12.029 13.8,11.8 ; 13.812,11.788 13.922,11.678 cw(c13.129,10.886) 14.25,10.886 DD1.4
VBUS: FP1.1 XS1.1
VCC3P3: C4.2 C5.2 C6.2 C7.2 C9.1 C10.2 DA1.1 DD1.6 DD1.7 DD2.1 HL1.1 HL2.1 HL3.1 KT3.1 R7.2 R8.2 R11.2 R16.2 R17.2 R18.1 R19.1 R20.1 R21.1 XP1.1 XP2.9 XP3.8 | length 96.5
  Top Layer w0.15: R20.1 8,19.5 9.2,20.7 12.6,20.7 ; 9.1,6.5 R7.2 ; R8.2 14.5,3.8 14.7,3.6 ; C7.2 R11.2 ; KT3.1 20,15 ; v1(23.5,18.4) R17.2 R16.2
  Top Layer w0.2: HL1.1 HL2.1 HL3.1 8.6,1.548 8.8,1.748 8.8,3.3 9.625,4.125 ; v1(11.45,11.4) C5.2 ; DD1.7 12.35,9.25 12.1,9.5 C4.2 C5.2 ; DD1.6 12.85,9.75 12.1,10.5 C5.2 ; DD2.1 24.75,14.75 24.5,15 C10.2 C9.1 v1(25.5,14.9) ; R18.1 v1(28.6,11.5) ; v1(29.4,13.5) R19.1 R21.1
  Top Layer w0.6: v1@11.4,11.4 9.7,11.4 9.1,10.8 9.1,6.5 9.1,4.65 9.625,4.125 10.15,3.6 14.7,3.6 15.15,3.15 XP3.8 ; XP2.9 12.61,20.39 13.5,19.5 17,19.5 17.5,19 19,19 20,18 v1(20,16) 20,15 18.5,13.5 v1(13,13.5)
  Bottom Layer w0.6: v1(11.45,11.4) 11.2,11.65 11.2,12.848 11.852,13.5 v1(13,13.5) ; v1(20,16) 21.1,16 v1(23.5,18.4) 26.5,18.4 ; v1(28.6,11.5) 29.4,12.3 v1(29.4,13.5) 25.8,13.5 25.5,13.8 v1(25.5,14.9) 26.5,15.9 26.5,18.4 ; XP1.1 30.62,17.08 29.3,18.4 26.5,18.4
VCC5P0: C3.2 FP1.2 L1.1 R5.1 XP3.7 | length 27.6
  Top Layer w0.2: v1(9.9,8.5) R5.1
  Bottom Layer w0.2: v1(9.9,8.5) 10.7,8.5 11.45,9.25 11.45,10.25 11.2,10.5
  Bottom Layer w0.6: v1(9.6,16.2) 9.6,12.1 11.2,10.5 13.5,10.5 15,12 17.6,12 18.1,11.5 18.1,10.1 17.69,9.69 XP3.7
  other v1: 8.9,16.2
pads on no net: DD1.1 DD1.2 DD1.10 DD1.11 DD1.14 DD1.15 DD1.16 SB1.4 SB2.4 XS1.0

## Polygon pours and split planes (outlines as drawn)
GND on Bottom Layer "GND_L02_P000" (solid, remove dead copper, pour order 0): 0,0 35,0 35,24 0,24
GND on Top Layer "GND_L01_P024" (solid, remove dead copper, pour order 24): 0,24 0,0 35,0 35,24 16.2,24 16.2,17.5 18,17.5 18.9,18.4 19.5,17.8 19.5,15.3 12.8,15.3 12.8,18.6 16.2,18.6 16.2,24
VCC3P3 on Top Layer "VCC3P3_L01_P020" (solid, remove dead copper, pour order 20): 15.9,16.175 16.4,16.175 16.525,16.3 20,16.3 20,15.7 16.575,15.7 16.4,15.875 15.9,15.875
GND on Top Layer "GND_L01_P018" (solid, remove dead copper, pour order 18): 13.75,14.625 14.375,14 18.1,14 18.8,14.7 18.8,15.2 18.7,15.3 15.6,15.3 15.25,15.65 15.25,16.525 15.9,16.525 15.9,16.825 15.25,16.825 15.25,17.825 15.9,17.825 15.9,18.125 13.75,18.125 13.75,17.475 13.1,17.475 13.1,17.175 13.75,17.175 13.75,16.825 13.1,16.825 13.1,16.525 13.75,16.525
GND on Top Layer "GND_L01_P016" (solid, remove dead copper, pour order 16): 13.7,14.7
GND on Top Layer "GND_L01_P014" (solid, remove dead copper, pour order 14): 13.7,14.9
NetC2_2 on Top Layer "NETC2_2_L01_P012" (solid, remove dead copper, pour order 12): 10.275,15.3 10.175,15.2 10.175,14.875 10.25,14.8 12.25,14.8 12.65,15.2 12.65,15.65 12.875,15.875 13.125,15.875 13.125,16.175 12.875,16.175 12.65,16.4 12.65,17.6 12.875,17.825 13.125,17.825 13.125,18.125 12.625,18.125 12,17.5 12,15.5 11.8,15.3
VCC5P0 on Top Layer "VCC5P0_L01_P010" (solid, remove dead copper, pour order 10): 6,15.9 6,16.5 6.2,16.7 10.4,16.7 10.825,16.275 10.825,15.775 10.75,15.7 6.2,15.7
NetC1_2 on Top Layer "NETC1_2_L01_P008" (solid, remove dead copper, pour order 8): 8.5,7.501 8.298,7.299 0,7.299 0,16.75 4.75,16.75 5,16.5 5,14.5 3.1,14.5 3.1,9.5 5,9.5 5,8.9 5.7,8.2 8.3,8.2 8.5,8
NetC1_2 on Top Layer "NETC1_2_L01_P006" (solid, remove dead copper, pour order 6): 8.5,7.3
GND on Top Layer "GND_L01_P004" (solid, remove dead copper, pour order 4): 3.775,10.5 3.775,10.9 5.4,10.9 5.4,11.15 3.775,11.15 3.775,11.55 6.55,11.55 6.9,11.2 7.8,11.2 8.5,10.5 8.5,9 8.3,8.8 6.2,8.8 6,9 6,9.9 5.4,10.5
VBUS on Top Layer "VBUS_L01_P002" (solid, remove dead copper, pour order 2): 3.8,13.5 3.8,13.1 6.1,13.1 7,14 7,15 6.8,15.2 6.2,15.2 6,15 6,14 5.5,13.5

## Other copper
Bottom Layer:
  rectangle net VCC5P0: 8.9,15.9 9.6,16.5

## Silkscreen, mask and mechanical layers (free items; w line width, h text height)
Top Overlay:
  text ".PCB_Week" at 26,6.75 h2
  text "A_D" at 27.5,6 h1.5
Bottom Overlay:
  text "PA0" at 34.5,19.1 h1.8
  text "PA7" at 14.71,18.4 h1.3 r270
  text "3P3" at 11.97,17.8 h1.8 r270
  text "PA1" at 29.75,17.6 h1.8 r270
  text "PA6" at 17.05,17.5 h1.8 r270
  text "PA5" at 19.59,17.5 h1.8 r270
  text "PA4" at 22.13,17.5 h1.8 r270
  text "PA3" at 24.67,17.5 h1.8 r270
  text "PA2" at 27.21,17.5 h1.8 r270
  text "GND" at 9.43,17.3 h1.8 r270
  text "PB0" at 34.4,3.7 h1.8
  text "GND" at 9.4,3.5 h1.8 r270
  text "GND" at 11.94,3.5 h1.8 r270
  text "3P3" at 14.48,3.5 h1.8 r270
  text "5P0" at 17.02,3.5 h1.8 r270
  text "PB5" at 19.56,3.5 h1.8 r270
  text "PB4" at 22.1,3.5 h1.8 r270
  text "PB3" at 24.64,3.5 h1.8 r270
  text "PB2" at 27.18,3.5 h1.8 r270
  text "PB1" at 29.72,3.5 h1.8 r270
Bottom Solder:
  rectangle: 13.7,16.1 15.3,17.9
  rectangle: 13.5,7.5 15.5,9.5
  rectangle: 22.9,11.4 25.1,13.6
1 - Board Outline:
  the board outline again, w0.2